# Altium PCB Microneedle_Patch_V2.PcbDoc
Units mm, origin at the board's own origin, x right, y up, seen from the top; angles counter-clockwise.
Board outline 28.8 x 93 mm, 2 copper layers (Top, Bottom), stack 0.137 mm thick; 33 components, 33 nets, 708 pads, 16 vias.
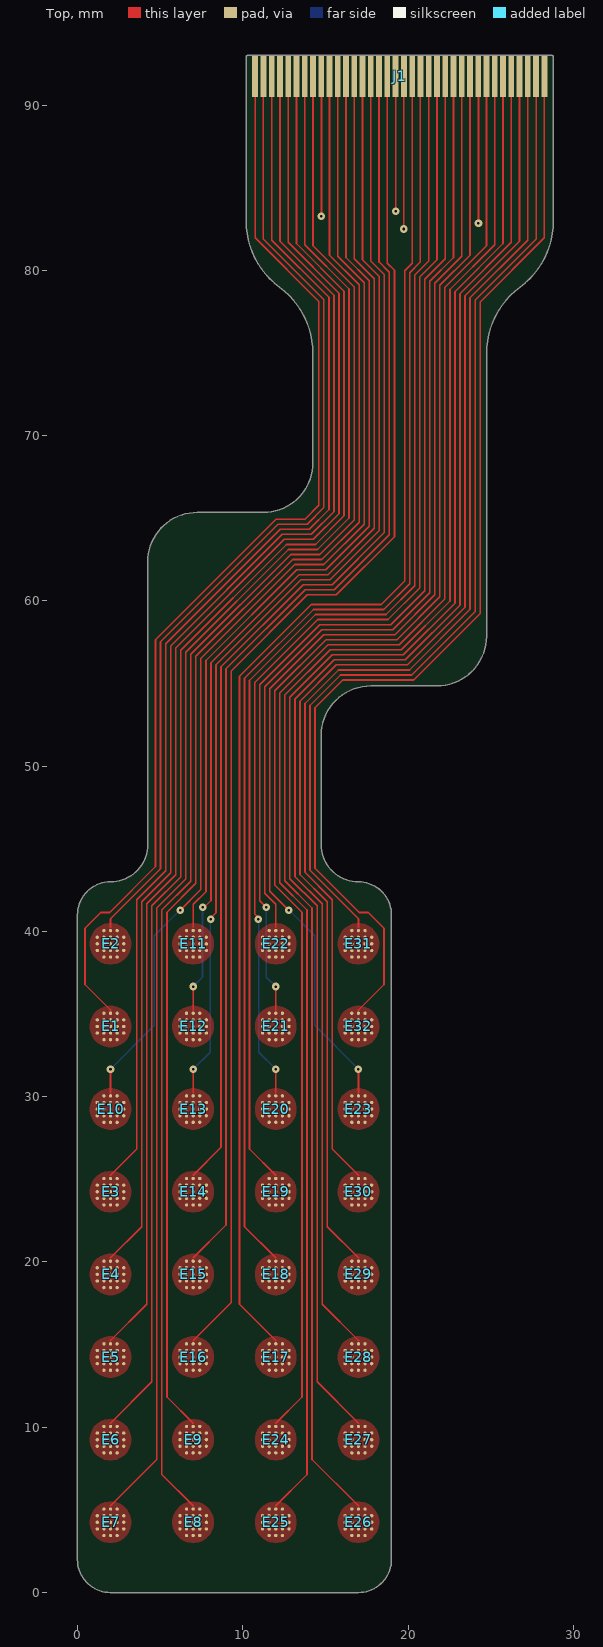
[diagram p0: Top view]
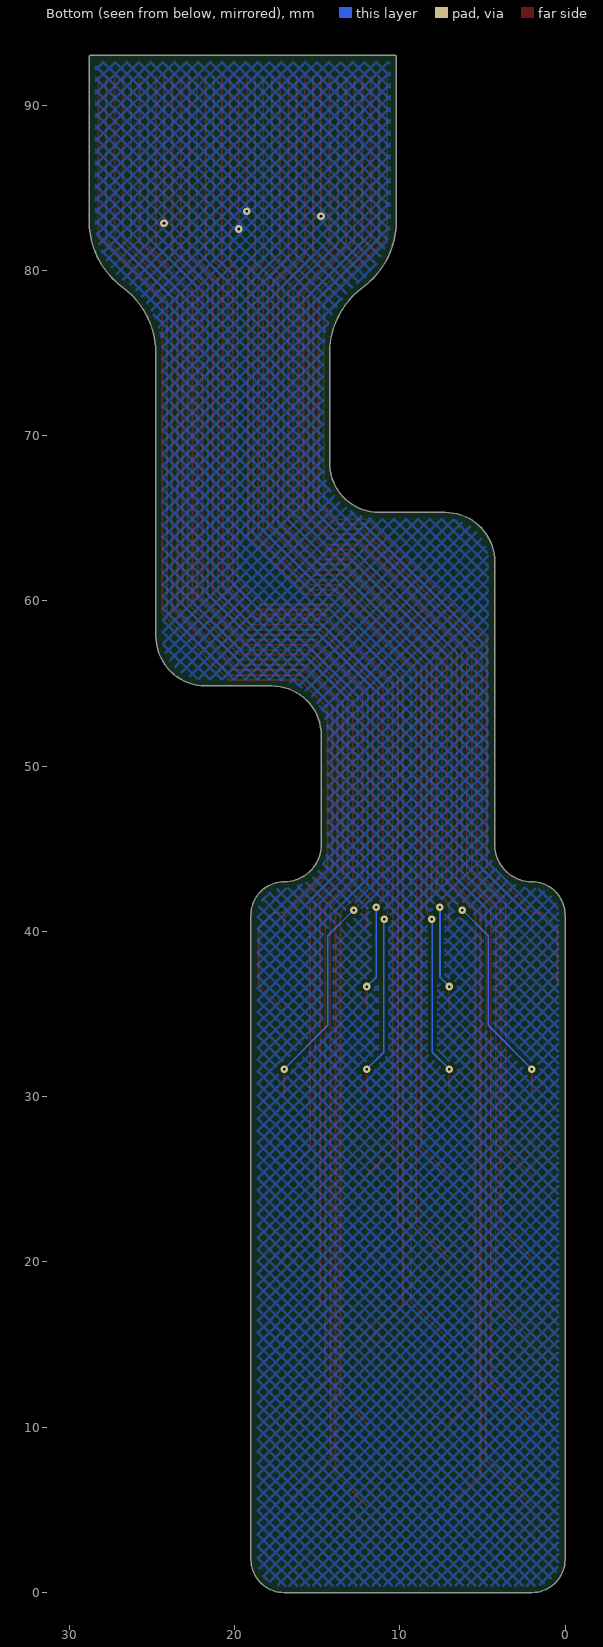
[diagram p1: Bottom view, seen from below]
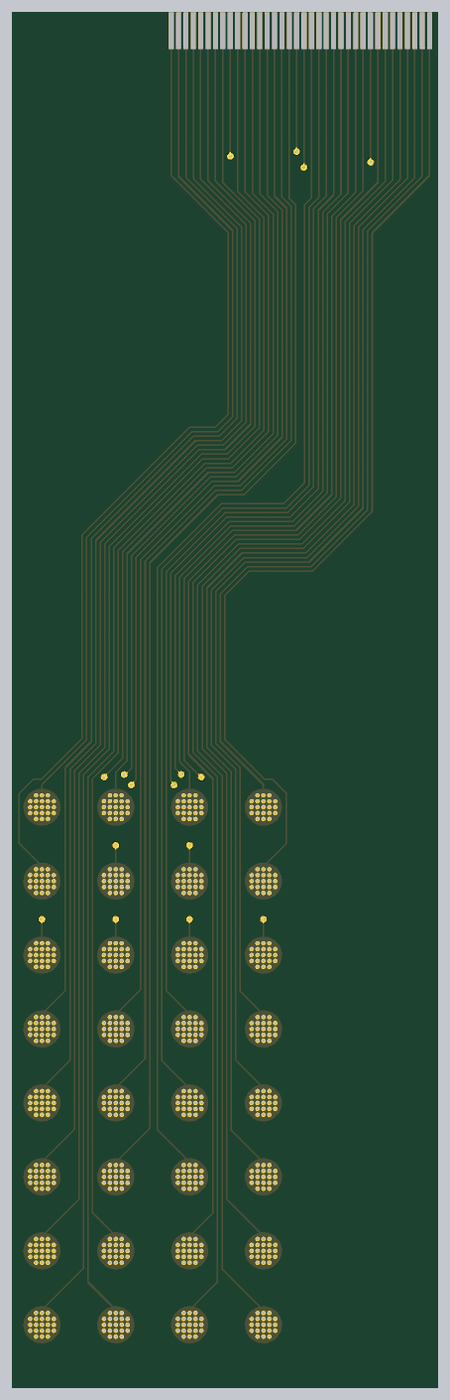
[diagram p2: 3D render of the assembled board from above, using the file's embedded part models]

## Layer stack, top to bottom
Board Layer Stack Top Coverlay: solder mask 0.025, Polymide, Dk 3.4
Adhesive 3: prepreg 0.025, Adhesive, Dk 3.3
Top: signal copper 0.018
Dielectric 1: core 0.013, Composite dielectric, Dk 3.3
Dielectric 3: core 0.025, Polymide, Dk 3.4
Dielectric 2: core 0.013, Composite dielectric, Dk 3.3
Bottom: signal copper 0.018
Adhesive 2: prepreg 0.025, Adhesive, Dk 3.3
Board Layer Stack Bottom Coverlay: solder mask 0.025, Polymide, Dk 3.4

## Board outline
2,0 cw(c2,2) 0,2 0,41 cw(c2,41) 2,43 ccw(c2,45.25) 4.25,45.25 4.25,62.356 cw(c7.25,62.356) 7.25,65.356 11.25,65.356 ccw(c11.25,68.356) 14.25,68.356 14.25,74.963 ccw(c9.25,74.963) 12.225,78.981 cw(c15.2,83) 10.2,83 10.2,92.9 cw(c10.3,92.9) 10.3,93 28.7,93 cw(c28.7,92.9) 28.8,92.9 28.8,83 cw(c23.8,83) 26.775,78.981 ccw(c29.75,74.963) 24.75,74.963 24.75,57.856 cw(c21.75,57.856) 21.75,54.856 17.75,54.856 ccw(c17.75,51.856) 14.75,51.856 14.75,45.25 ccw(c17,45.25) 17,43 cw(c17,41) 19,41 19,2 cw(c17,2) 17,0

## Design rules (kind name [scope] priority, off if disabled: settings)
BoardOutlineClearance ZIF_BoardEdge [InPadClass('ZIF_Pads')] p1: gap=0.305 ignorepadtopadclearanceinfootprint=FALSE except(0: SMDPad-OutlineEdge)
BoardOutlineClearance [All] p2: gap=0.305 ignorepadtopadclearanceinfootprint=FALSE except(0: SMDPad-OutlineEdge)
Clearance [All] p1: gap=0.203 ignorepadtopadclearanceinfootprint=TRUE except(0.127: Arc-SMDPad Track-SMDPad SMDPad-SMDPad)
ComponentClearance [All] p1: gap=0.102 collisioncheckmode=3 verticalgap=0.102 showdistances=FALSE
HoleSize [All] p1: absolutevalues=TRUE maxlimit=25.4 minlimit=0.102 maxpercent=80.000 minpercent=20.000
HoleToHoleClearance [All] p1: gap=0.254 allowstackedmicrovias=FALSE
MinimumSolderMaskSliver [All] p1: minsoldermaskwidth=0.1
PlaneClearance [All] p1: clearance=0.152
PlaneConnect [All] p1: pad.planeconnectstyle=Relief pad.reliefexpansion=0.508 pad.reliefentries=4 pad.reliefconductorwidth=0.254 pad.reliefairgap=0.254 via.planeconnectstyle=Direct via.reliefexpansion=0.508 via.reliefentries=4 via.reliefconductorwidth=0.254 via.reliefairgap=0.254
PolygonConnect [All] p1: thpad.connectstyle=Relief thpad.reliefconductorwidth=0.254 thpad.reliefentries=4 thpad.polygonreliefangle="90 Angle" thpad.airgapwidth=0.254 smdpad.connectstyle=Direct smdpad.reliefconductorwidth=0.254 smdpad.reliefentries=4 smdpad.polygonreliefangle="90 Angle" smdpad.airgapwidth=0.254 via.connectstyle=Direct via.reliefconductorwidth=0.254 via.reliefentries=4 via.polygonreliefangle="90 Angle" via.airgapwidth=0.254
RoutingVias [All] p1: holewidth=0.152 width=0.457 viastyle="Through Hole" minholewidth=0.152 minwidth=0.457 maxholewidth=0.152 maxwidth=0.457
SilkToSilkClearance [All] p1: silktosilkclearance=0.102
SilkToSolderMaskClearance [IsPad] p1: minsilkscreentomaskgap=0.051 clearancetoexposedcopper=FALSE
SolderMaskExpansion [All] p1: expansion=0.051 istentingtop=FALSE
SupplyNets "Schematic Supply Nets" [InNet('GND')] p1: voltage=0.000
Width [All] p1: maxlimit=0.102 minlimit=0.102 preferedwidth=0.102 minimp=50.000000 maximp=50.000000 favimp=50.000000
22 further rules are at their usual default settings.

## Components (designator, comment, footprint, x,y, rotation, side; value= is the part's Value field where it differs from the comment)
E1 "UNeedle" UNeedle 2,34.25 r0 top
E2 "UNeedle" UNeedle 2,39.25 r0 top
E3 "UNeedle" UNeedle 2,24.25 r0 top
E4 "UNeedle" UNeedle 2,19.25 r0 top
E5 "UNeedle" UNeedle 2,14.25 r0 top
E6 "UNeedle" UNeedle 2,9.25 r0 top
E7 "UNeedle" UNeedle 2,4.25 r0 top
E8 "UNeedle" UNeedle 7,4.25 r0 top
E9 "UNeedle" UNeedle 7,9.25 r0 top
E10 "UNeedle" UNeedle 2,29.25 r0 top
E11 "UNeedle" UNeedle 7,39.25 r0 top
E12 "UNeedle" UNeedle 7,34.25 r0 top
E13 "UNeedle" UNeedle 7,29.25 r0 top
E14 "UNeedle" UNeedle 7,24.25 r0 top
E15 "UNeedle" UNeedle 7,19.25 r0 top
E16 "UNeedle" UNeedle 7,14.25 r0 top
E17 "UNeedle" UNeedle 12,14.25 r0 top
E18 "UNeedle" UNeedle 12,19.25 r0 top
E19 "UNeedle" UNeedle 12,24.25 r0 top
E20 "UNeedle" UNeedle 12,29.25 r90 top
E21 "UNeedle" UNeedle 12,34.25 r0 top
E22 "UNeedle" UNeedle 12,39.25 r90 top
E23 "UNeedle" UNeedle 17,29.25 r90 top
E24 "UNeedle" UNeedle 12,9.25 r90 top
E25 "UNeedle" UNeedle 12,4.25 r90 top
E26 "UNeedle" UNeedle 17,4.25 r90 top
E27 "UNeedle" UNeedle 17,9.25 r90 top
E28 "UNeedle" UNeedle 17,14.25 r90 top
E29 "UNeedle" UNeedle 17,19.25 r90 top
E30 "UNeedle" UNeedle 17,24.25 r90 top
E31 "UNeedle" UNeedle 17,39.25 r0 top
E32 "UNeedle" UNeedle 17,34.25 r90 top
J1 "3-2492104-6" Fingers 19.5,91.75 r0 top

## Footprints (in the part's own frame and the unit in brackets; to place one, negate y for a bottom-side part, rotate by r counter-clockwise, add the part's x,y. Pads: shape width x height; smd on the part's side, far side on the other; paste and mask are expansions set on the pad)
Fingers [mm]
  rect 0.35x2.5 smd mask+0: 1(-8.75,0) 2(-8.25,0) 3(-7.75,0) 4(-7.25,0) 5(-6.75,0) 6(-6.25,0) 7(-5.75,0) 8(-5.25,0) 9(-4.75,0) 10(-4.25,0) 11(-3.75,0) 12(-3.25,0) 13(-2.75,0) 14(-2.25,0) 15(-1.75,0) 16(-1.25,0) 17(-0.75,0) 18(-0.25,0) 19(0.25,0) 20(0.75,0) 21(1.25,0) 22(1.75,0) 23(2.25,0) 24(2.75,0) 25(3.25,0) 26(3.75,0) 27(4.25,0) 28(4.75,0) 29(5.25,0) 30(5.75,0) 31(6.25,0) 32(6.75,0) 33(7.25,0) 34(7.75,0) 35(8.25,0) 36(8.75,0)
UNeedle [mm]
  round 0.2 smd paste+0 mask+0.05: 1(-0.8,-0.4) 1(-0.8,0) 1(-0.8,0.4) 1(-0.4,-0.8) 1(-0.4,-0.4) 1(-0.4,0) 1(-0.4,0.4) 1(-0.4,0.8) 1(0,-0.8) 1(0,-0.4) 1(0,0) 1(0,0.4) 1(0,0.8) 1(0.4,-0.8) 1(0.4,-0.4) 1(0.4,0) 1(0.4,0.4) 1(0.4,0.8) 1(0.8,-0.4) 1(0.8,0) 1(0.8,0.4)
  body extent -0.82,-0.82 0.82,0.82, height 0.4

## Part data
J1: library part Fingers, "XXX - Description - Package", GRAMS Lib Spec=2.7

## Via types
v1: diameter 0.457, hole 0.152, Top to Bottom, 16 vias

## Nets (pads, with @x,y where several pads share a name; then routed paths per layer and width w, separated by ;. In a path a pad name is that pad's centre, name@x,y a point inside that pad or via, vN(x,y) a via of type N, cw(c..) or ccw(c..) an arc to the next point about the centre after c; other vN are vias at no path point)
GND: J1.9 J1.18 J1.19 J1.28 | length 34.8
  Top w0.102: J1.9 14.764,91.736 v1(14.764,83.261) ; v1(19.25,83.566) J1.18 ; v1(19.742,82.499) 19.742,91.742 J1.19 ; J1.28 24.264,91.736 v1(24.264,82.855)
Input1: E1.1 J1.1 | length 65.9
  Top w0.102: 2,35.25 0.457,36.793 0.457,40.196 1.408,41.147 1.947,41.147 4.725,43.925 4.725,57.652 12.012,64.94 13.769,64.94 14.606,65.776 14.606,78.109 10.75,81.964 J1.1
Input2: E2.1 J1.2 | length 59.4
  Top w0.102: 2,40.25 2,40.769 5.03,43.799 5.03,57.128 5.03,57.526 12.139,64.635 13.895,64.635 14.91,65.65 14.91,78.235 11.25,81.895 J1.2
Input3: E3.1 J1.3 | length 74.4
  Top w0.102: 2,25.25 3.586,26.836 3.586,41.924 5.334,43.672 5.334,57.399 12.265,64.33 14.021,64.33 15.215,65.524 15.215,78.361 11.75,81.827 J1.3
Input4: E4.1 J1.4 | length 79.5
  Top w0.102: 2,20.25 3.89,22.14 3.89,41.797 5.639,43.546 5.639,57.273 12.391,64.025 14.148,64.025 15.52,65.398 15.52,78.488 12.25,81.758 J1.4
Input5: E5.1 J1.5 | length 84.5
  Top w0.102: 2,15.25 4.195,17.445 4.195,41.671 5.944,43.42 5.944,57.147 12.517,63.72 14.274,63.72 15.825,65.271 15.825,78.614 12.75,81.689 J1.5
Input6: E6.1 J1.6 | length 89.6
  Top w0.102: 2,10.25 4.5,12.75 4.5,41.545 6.249,43.294 6.249,57.021 12.644,63.416 14.4,63.416 16.13,65.145 16.13,78.74 13.25,81.62 J1.6
Input7: E7.1 J1.7 | length 94.6
  Top w0.102: 2,5.25 4.805,8.055 4.805,41.418 6.554,43.167 6.554,56.894 12.77,63.111 14.526,63.111 16.434,65.019 16.434,78.866 13.75,81.551 J1.7
Input8: E8.1 J1.8 | length 94.2
  Top w0.102: 7,5.25 5.11,7.14 5.11,41.292 6.858,43.041 6.858,56.768 12.896,62.806 14.653,62.806 16.739,64.893 16.739,78.993 14.25,81.482 J1.8
Input9: E9.1 J1.10 | length 88.7
  Top w0.102: 7,10.25 5.414,11.836 5.414,41.166 7.163,42.915 7.163,56.642 13.022,62.501 14.779,62.501 17.044,64.766 17.044,79.119 15.25,80.913 J1.10
Input10: E10.1 J1.11 | length 69.6
  Top w0.102: 2,30.25 v1(2,31.667) ; v1(6.213,41.282) 7.468,42.537 7.468,56.516 13.149,62.196 14.905,62.196 17.349,64.64 17.349,79.245 15.75,80.844 J1.11
  Bottom w0.102: v1@2.007,31.674 4.648,34.315 4.648,39.737 6.203,41.292 v1(6.213,41.282)
Input11: E11.1 J1.12 | length 57.5
  Top w0.102: 7,40.25 7,41.638 7.773,42.411 7.773,56.389 13.275,61.892 15.031,61.892 17.654,64.514 17.654,79.371 16.25,80.775 J1.12
Input12: E12.1 J1.13 | length 62.6
  Top w0.102: 7,35.25 v1(7,36.667) ; v1(7.569,41.453) 7.661,41.453 8.078,41.87 8.078,56.263 13.401,61.587 15.158,61.587 17.958,64.388 17.958,79.498 16.75,80.706 J1.13
  Bottom w0.102: v1@7.007,36.674 7.569,37.236 v1(7.569,41.453)
Input13: E13.1 J1.14 | length 67.6
  Top w0.102: 7,30.25 v1(7,31.667) ; v1(8.052,40.742) 8.052,40.798 8.382,41.128 8.382,56.137 13.527,61.282 15.284,61.282 18.263,64.261 18.263,79.624 17.25,80.637 J1.14
  Bottom w0.102: v1@7.007,31.674 8.026,32.694 8.026,40.716 v1(8.052,40.742)
Input14: E14.1 J1.15 | length 72.7
  Top w0.102: 7,25.25 8.687,26.937 8.687,56.011 13.654,60.977 15.41,60.977 18.568,64.135 18.568,79.75 17.75,80.568 J1.15
Input15: E15.1 J1.16 | length 77.7
  Top w0.102: 7,20.25 8.992,22.242 8.992,55.884 13.78,60.672 15.536,60.672 18.873,64.009 18.873,79.876 18.25,80.499 J1.16
Input16: E16.1 J1.17 | length 82.8
  Top w0.102: 7,15.25 9.297,17.547 9.297,55.758 13.906,60.368 15.663,60.368 19.178,63.883 19.178,80.003 18.75,80.43 J1.17
Input17: E17.1 J1.20 | length 84.2
  Top w0.102: 12,15.25 9.804,17.446 9.804,55.437 14.151,59.784 18.373,59.784 19.793,61.204 19.793,79.973 20.25,80.43 J1.20
Input18: E18.1 J1.21 | length 79.2
  Top w0.102: 12,20.25 10.109,22.141 10.109,55.311 14.278,59.479 18.542,59.479 20.098,61.035 20.098,79.847 20.75,80.499 J1.21
Input19: E19.1 J1.22 | length 74.1
  Top w0.102: 12,25.25 10.414,26.836 10.414,55.184 14.404,59.174 18.668,59.174 20.403,60.909 20.403,79.721 21.25,80.568 J1.22
Input20: E20.1 J1.23 | length 69.1
  Top w0.102: v1(10.948,40.742) 10.948,40.822 10.719,41.051 10.719,55.058 14.53,58.87 18.794,58.87 20.708,60.783 20.708,79.595 21.75,80.637 J1.23 ; 12,30.25 v1(12,31.667)
  Bottom w0.102: v1(10.948,40.742) 10.974,40.716 10.974,32.694 v1@11.993,31.674
Input21: E21.1 J1.24 | length 64.1
  Top w0.102: v1(11.431,41.453) 11.024,41.86 11.024,54.932 14.656,58.565 18.957,58.565 21.012,60.62 21.012,79.468 22.25,80.706 J1.24 ; 12,35.25 v1(12,36.667)
  Bottom w0.102: v1(11.431,41.453) 11.431,37.236 v1@11.993,36.674
Input22: E22.1 J1.25 | length 59
  Top w0.102: 12,40.25 12,41.638 11.328,42.31 11.328,54.806 14.783,58.26 19.083,58.26 21.317,60.494 21.317,79.342 22.75,80.775 J1.25
Input23: E23.1 J1.26 | length 71.1
  Top w0.102: v1(12.787,41.282) 11.633,42.436 11.633,54.679 14.909,57.955 19.21,57.955 21.622,60.368 21.622,79.216 23.25,80.844 J1.26 ; 17,30.25 v1(17,31.667)
  Bottom w0.102: v1(12.787,41.282) 12.797,41.292 14.352,39.737 14.352,34.315 v1@16.993,31.674
Input24: E24.1 J1.27 | length 90.3
  Top w0.102: 12,10.25 13.586,11.836 13.586,41.166 11.938,42.814 11.938,54.553 15.035,57.65 19.336,57.65 21.927,60.241 21.927,79.09 23.75,80.913 J1.27
Input25: E25.1 J1.29 | length 95.7
  Top w0.102: 12,5.25 13.89,7.14 13.89,41.292 12.243,42.94 12.243,54.427 15.161,57.346 19.462,57.346 22.232,60.115 22.232,78.963 24.75,81.482 J1.29
Input26: E26.1 J1.30 | length 96.1
  Top w0.102: 17,5.25 14.195,8.055 14.195,41.418 12.548,43.066 12.548,54.301 15.288,57.041 19.588,57.041 22.536,59.989 22.536,78.837 25.25,81.551 J1.30
Input27: E27.1 J1.31 | length 91.1
  Top w0.102: 17,10.25 14.5,12.75 14.5,41.545 12.852,43.192 12.852,54.174 15.414,56.736 19.715,56.736 22.841,59.863 22.841,78.711 25.75,81.62 J1.31
Input28: E28.1 J1.32 | length 86
  Top w0.102: 17,15.25 14.805,17.445 14.805,41.671 13.157,43.319 13.157,54.048 15.54,56.431 19.841,56.431 23.146,59.736 23.146,78.585 26.25,81.689 J1.32
Input29: E29.1 J1.33 | length 81
  Top w0.102: 17,20.25 15.11,22.14 15.11,41.797 13.462,43.445 13.462,53.922 15.666,56.126 19.967,56.126 23.451,59.61 23.451,78.458 26.75,81.758 J1.33
Input30: E30.1 J1.34 | length 75.9
  Top w0.102: 17,25.25 15.414,26.836 15.414,41.924 13.767,43.571 13.767,53.796 15.793,55.822 20.093,55.822 23.756,59.484 23.756,78.332 27.25,81.827 J1.34
Input31: E31.1 J1.35 | length 60.9
  Top w0.102: 17,40.25 17,40.769 14.072,43.697 14.072,53.669 15.919,55.517 20.22,55.517 24.06,59.358 24.06,78.206 27.75,81.895 J1.35
Input32: E32.1 J1.36 | length 67.4
  Top w0.102: 17,35.25 18.543,36.793 18.543,40.196 17.592,41.147 17.053,41.147 14.376,43.824 14.376,53.543 16.045,55.212 20.346,55.212 24.365,59.231 24.365,78.08 28.25,81.964 J1.36

## Polygon pours and split planes (outlines as drawn)
Input8 on Top "Electrode8" (solid, pour order 31): 7,5.5 cw(c7,4.25) 8.25,4.25 cw(c7,4.25) 7,3 cw(c7,4.25) 5.75,4.25 cw(c7,4.25)
Input16 on Top "Electrode16" (solid, pour order 30): 7,15.5 cw(c7,14.25) 8.25,14.25 cw(c7,14.25) 7,13 cw(c7,14.25) 5.75,14.25 cw(c7,14.25)
Input17 on Top "Electrode17" (solid, pour order 29): 12,15.5 cw(c12,14.25) 13.25,14.25 cw(c12,14.25) 12,13 cw(c12,14.25) 10.75,14.25 cw(c12,14.25)
Input25 on Top "Electrode25" (solid, pour order 28): 12,5.5 cw(c12,4.25) 13.25,4.25 cw(c12,4.25) 12,3 cw(c12,4.25) 10.75,4.25 cw(c12,4.25)
Input26 on Top "Electrode26" (solid, pour order 27): 17,5.5 cw(c17,4.25) 18.25,4.25 cw(c17,4.25) 17,3 cw(c17,4.25) 15.75,4.25 cw(c17,4.25)
Input18 on Top "Electrode18" (solid, pour order 26): 12,20.5 cw(c12,19.25) 13.25,19.25 cw(c12,19.25) 12,18 cw(c12,19.25) 10.75,19.25 cw(c12,19.25)
Input15 on Top "Electrode15" (solid, pour order 25): 7,20.5 cw(c7,19.25) 8.25,19.25 cw(c7,19.25) 7,18 cw(c7,19.25) 5.75,19.25 cw(c7,19.25)
Input7 on Top "Electrode7" (solid, pour order 24): 2,5.5 cw(c2,4.25) 3.25,4.25 cw(c2,4.25) 2,3 cw(c2,4.25) 0.75,4.25 cw(c2,4.25)
Input6 on Top "Electrode6" (solid, pour order 23): 2,10.5 cw(c2,9.25) 3.25,9.25 cw(c2,9.25) 2,8 cw(c2,9.25) 0.75,9.25 cw(c2,9.25)
Input14 on Top "Electrode14" (solid, pour order 22): 7,25.5 cw(c7,24.25) 8.25,24.25 cw(c7,24.25) 7,23 cw(c7,24.25) 5.75,24.25 cw(c7,24.25)
Input19 on Top "Electrode19" (solid, pour order 21): 12,25.5 cw(c12,24.25) 13.25,24.25 cw(c12,24.25) 12,23 cw(c12,24.25) 10.75,24.25 cw(c12,24.25)
Input27 on Top "Electrode27" (solid, pour order 20): 17,10.5 cw(c17,9.25) 18.25,9.25 cw(c17,9.25) 17,8 cw(c17,9.25) 15.75,9.25 cw(c17,9.25)
Input28 on Top "Electrode28" (solid, pour order 19): 17,15.5 cw(c17,14.25) 18.25,14.25 cw(c17,14.25) 17,13 cw(c17,14.25) 15.75,14.25 cw(c17,14.25)
Input21 on Top "Electrode21" (solid, pour order 18): 12,35.5 cw(c12,34.25) 13.25,34.25 cw(c12,34.25) 12,33 cw(c12,34.25) 10.75,34.25 cw(c12,34.25)
Input13 on Top "Electrode13" (solid, pour order 17): 7,30.5 cw(c7,29.25) 8.25,29.25 cw(c7,29.25) 7,28 cw(c7,29.25) 5.75,29.25 cw(c7,29.25)
Input5 on Top "Electrode5" (solid, pour order 16): 2,15.5 cw(c2,14.25) 3.25,14.25 cw(c2,14.25) 2,13 cw(c2,14.25) 0.75,14.25 cw(c2,14.25)
Input4 on Top "Electrode4" (solid, pour order 15): 2,20.5 cw(c2,19.25) 3.25,19.25 cw(c2,19.25) 2,18 cw(c2,19.25) 0.75,19.25 cw(c2,19.25)
Input12 on Top "Electrode12" (solid, pour order 14): 7,35.5 cw(c7,34.25) 8.25,34.25 cw(c7,34.25) 7,33 cw(c7,34.25) 5.75,34.25 cw(c7,34.25)
Input20 on Top "Electrode20" (solid, pour order 13): 12,30.5 cw(c12,29.25) 13.25,29.25 cw(c12,29.25) 12,28 cw(c12,29.25) 10.75,29.25 cw(c12,29.25)
Input29 on Top "Electrode29" (solid, pour order 12): 17,20.5 cw(c17,19.25) 18.25,19.25 cw(c17,19.25) 17,18 cw(c17,19.25) 15.75,19.25 cw(c17,19.25)
Input30 on Top "Electrode30" (solid, pour order 11): 17,25.5 cw(c17,24.25) 18.25,24.25 cw(c17,24.25) 17,23 cw(c17,24.25) 15.75,24.25 cw(c17,24.25)
Input22 on Top "Electrode22" (solid, pour order 10): 12,40.5 cw(c12,39.25) 13.25,39.25 cw(c12,39.25) 12,38 cw(c12,39.25) 10.75,39.25 cw(c12,39.25)
Input11 on Top "Electrode11" (solid, pour order 9): 7,40.5 cw(c7,39.25) 8.25,39.25 cw(c7,39.25) 7,38 cw(c7,39.25) 5.75,39.25 cw(c7,39.25)
Input3 on Top "Electrode3" (solid, pour order 8): 2,25.5 cw(c2,24.25) 3.25,24.25 cw(c2,24.25) 2,23 cw(c2,24.25) 0.75,24.25 cw(c2,24.25)
Input2 on Top "Electrode2" (solid, pour order 7): 2,40.5 cw(c2,39.25) 3.25,39.25 cw(c2,39.25) 2,38 cw(c2,39.25) 0.75,39.25 cw(c2,39.25)
Input10 on Top "Electrode10" (solid, pour order 6): 2,30.5 cw(c2,29.25) 3.25,29.25 cw(c2,29.25) 2,28 cw(c2,29.25) 0.75,29.25 cw(c2,29.25)
Input23 on Top "Electrode23" (solid, pour order 5): 17,30.5 cw(c17,29.25) 18.25,29.25 cw(c17,29.25) 17,28 cw(c17,29.25) 15.75,29.25 cw(c17,29.25)
Input31 on Top "Electrode31" (solid, pour order 4): 17,40.5 cw(c17,39.25) 18.25,39.25 cw(c17,39.25) 17,38 cw(c17,39.25) 15.75,39.25 cw(c17,39.25)
Input1 on Top "Electrode1" (solid, pour order 3): 2,35.5 cw(c2,34.25) 3.25,34.25 cw(c2,34.25) 2,33 cw(c2,34.25) 0.75,34.25 cw(c2,34.25)
Input9 on Top "Electrode9" (solid, pour order 2): 7,10.5 cw(c7,9.25) 8.25,9.25 cw(c7,9.25) 7,8 cw(c7,9.25) 5.75,9.25 cw(c7,9.25)
Input24 on Top "Electrode24" (solid, pour order 1): 12,10.5 cw(c12,9.25) 13.25,9.25 cw(c12,9.25) 12,8 cw(c12,9.25) 10.75,9.25 cw(c12,9.25)
Input32 on Top "Electrode32" (solid, pour order 0): 17,35.5 cw(c17,34.25) 18.25,34.25 cw(c17,34.25) 17,33 cw(c17,34.25) 15.75,34.25 cw(c17,34.25)
GND on Bottom "GND_BOT" (hatched 45Degree grid 0.508 track 0.152, remove dead copper, pour order 32): 8.25,93.777 31.344,93.777 31.344,80.01 27.686,76.352 27.686,57.201 25.197,54.712 16.764,54.712 14.783,52.73 14.783,44.298 15.748,43.332 17.932,43.332 18.898,42.367 18.898,1.27 17.678,0.051 -0.102,0.051 -0.102,9.398 0.102,9.601 0.102,42.316 4.318,46.533 4.318,64.11 5.639,65.43 10.18,65.43 13.5,68.75 13.5,75.713 8.25,80.963

## Silkscreen, mask and mechanical layers (free items; w line width, h text height)
Board Outline:
  circle w0.2: c9.5,0 r0.05
  lines w0.2: 0,2 ccw(c2,2) 2,0 17,0 ccw(c17,2) 19,2 19,41 ccw(c17,41) 17,43 cw(c17,45.25) 14.75,45.25 14.75,51.856 cw(c17.75,51.856) 17.75,54.856 21.75,54.856 ccw(c21.75,57.856) 24.75,57.856 24.75,74.963 cw(c29.75,74.963) 26.775,78.981 ccw(c23.8,83) 28.8,83 28.8,92.9 ccw(c28.7,92.9) 28.7,93 10.3,93 ccw(c10.3,92.9) 10.2,92.9 10.2,83 ccw(c15.2,83) 12.225,78.981 cw(c9.25,74.963) 14.25,74.963 14.25,68.356 cw(c11.25,68.356) 11.25,65.356 7.25,65.356 ccw(c7.25,62.356) 4.25,62.356 4.25,45.25 cw(c2,45.25) 2,43 ccw(c2,41) 0,41 0,2
Manufacturing Notes:
  lines w0.254: 32.15,12.51 99.46,12.51 99.46,16.32 32.15,16.32 32.15,20.13 99.46,20.13 99.46,23.94 32.15,23.94 32.15,27.75 99.46,27.75 99.46,31.56 32.15,31.56 32.15,35.37 99.46,35.37 99.46,39.18 32.15,39.18 32.15,42.99 99.46,42.99 99.46,44.26 ; 91.84,8.7 91.84,50.61 ; 91.84,54.42 91.84,50.61 ; 99.46,46.8 32.15,46.8 32.15,50.61 ; 32.15,50.61 99.46,50.61 ; 32.15,50.61 32.15,8.7 99.46,8.7 99.46,50.61 ; 32.15,50.61 32.15,54.42 99.46,54.42 99.46,50.61 ; 32.15,50.61 46.12,50.61 ; 46.12,50.61 46.12,8.7 58.82,8.7 58.82,50.61 ; 46.12,50.61 46.12,54.42 58.82,54.42 58.82,50.61 ; 58.82,50.61 68.98,50.61 ; 58.82,50.61 68.98,50.61 ; 68.98,50.61 68.98,8.7 82.95,8.7 82.95,50.61 ; 68.98,50.61 68.98,54.42 82.95,54.42 82.95,50.61 ; 82.95,50.61 91.84,50.61 ; 82.95,50.61 91.84,50.61 ; 91.84,50.61 99.46,50.61
  text "STIFFFENER:" at 32.647,91.437 h1.02
  text "MATERIAL: POLYMIDE (PI)" at 33.917,88.897 h1.02
  text "SIDE: BOTTOM SIDE OF FPC" at 33.917,86.357 h1.02
  text "STIFFENER AREA: DEFINED BY \"STIFFENER\" (GM18) MECHANICAL LAYER" at 33.917,83.817 h1.02
  text "STIFFENER SHALL COVER THE ENTIRE DEFINED AREA" at 33.917,81.277 h1.02
  text "ALIGN STIFFENER EDGES WITH THE DEFINED STIFFENER OUTLINE" at 33.917,78.737 h1.02
  text "FINAL FPC THICKNESS IN ZIF CONTACT REGION: 0.3 MM" at 33.917,76.197 h1.02
  text "Type" at 36.3,52.226 h1.52
  text "Material" at 49.762,52.226 h1.52
  text "Weight" at 61.954,52.226 h1.52
  text "Dk" at 86.846,52.226 h1.52
  text "Thickness" at 72.622,52.194 h1.52
  text "Df" at 95.228,52.178 h1.52
  text "Polymide" at 50.016,48.416 h1.52
  text "0.025 mm" at 72.876,48.147 h1.52
  text "0.015" at 94.466,48.147 h1.52
  text "Top Coverlay" at 33.931,48.13 h1.52
  text "3.4" at 86.846,48.13 h1.52
  text "0.025 mm" at 72.876,44.337 h1.52
  text "Adhesive" at 33.931,44.049 h1.52
  text "0.018 mm" at 72.876,40.527 h1.52
  text "Top Layer" at 33.931,40.51 h1.52
  text "0.5 oz" at 61.446,40.241 h1.52
  text "0.013 mm" at 72.876,36.717 h1.52
  text "Adhesive" at 33.931,36.429 h1.52
  text "0.025 mm" at 72.876,32.907 h1.52
  text "3.4" at 86.846,32.907 h1.52
  text "0.015" at 94.466,32.89 h1.52
  text "Polymide" at 50.016,32.873 h1.52
  text "Core" at 33.931,32.621 h1.52
  text "0.013 mm" at 72.876,29.097 h1.52
  text "Adhesive" at 33.931,28.809 h1.52
  text "0.5 oz" at 61.75,25.4 h1.52
  text "0.018 mm" at 72.876,25.287 h1.52
  text "Bottom Layer" at 33.931,25.27 h1.52
  text "0.025 mm" at 72.876,21.477 h1.52
  text "Adhesive" at 33.931,21.189 h1.52
  text "Polymide" at 50.016,17.919 h1.52
  text "0.025 mm" at 72.876,17.667 h1.52
  text "3.4" at 86.846,17.667 h1.52
  text "Bottom Coverlay" at 33.931,17.65 h1.52
  text "0.015" at 94.466,17.65 h1.52
  text "0.025 mm" at 72.876,14.143 h1.52
  text "Adhesive" at 33.931,13.856 h1.52
  text "0.088 mm" at 72.876,10.333 h1.52
  text "3.4" at 86.846,10.333 h1.52
  text "0.015" at 94.466,10.316 h1.52
  text "Polymide" at 50.016,10.299 h1.52
  text "Bottom Stiffener" at 33.931,10.047 h1.52
  text "Finished thickness (with stiffener): 0.30 mm nominal" at 32.21,6.011 h1.52
  text "Finished thickness (without stiffener): 0.187 mm nominal" at 32.31,4.311 h1.52
  text "Substrate Finish: ENEPIG" at 32.31,2.45 h1.52
  text "Thickness of Immersion Gold: 4U\"" at 32.25,0.629 h1.52
Stiffener:
  lines w0.2: 10.2,88.5 28.8,88.5 28.8,93 10.2,93 10.2,88.5